# EAGLE board Current Sensor PCB Electronic Design (EAGLE 9.7.0)
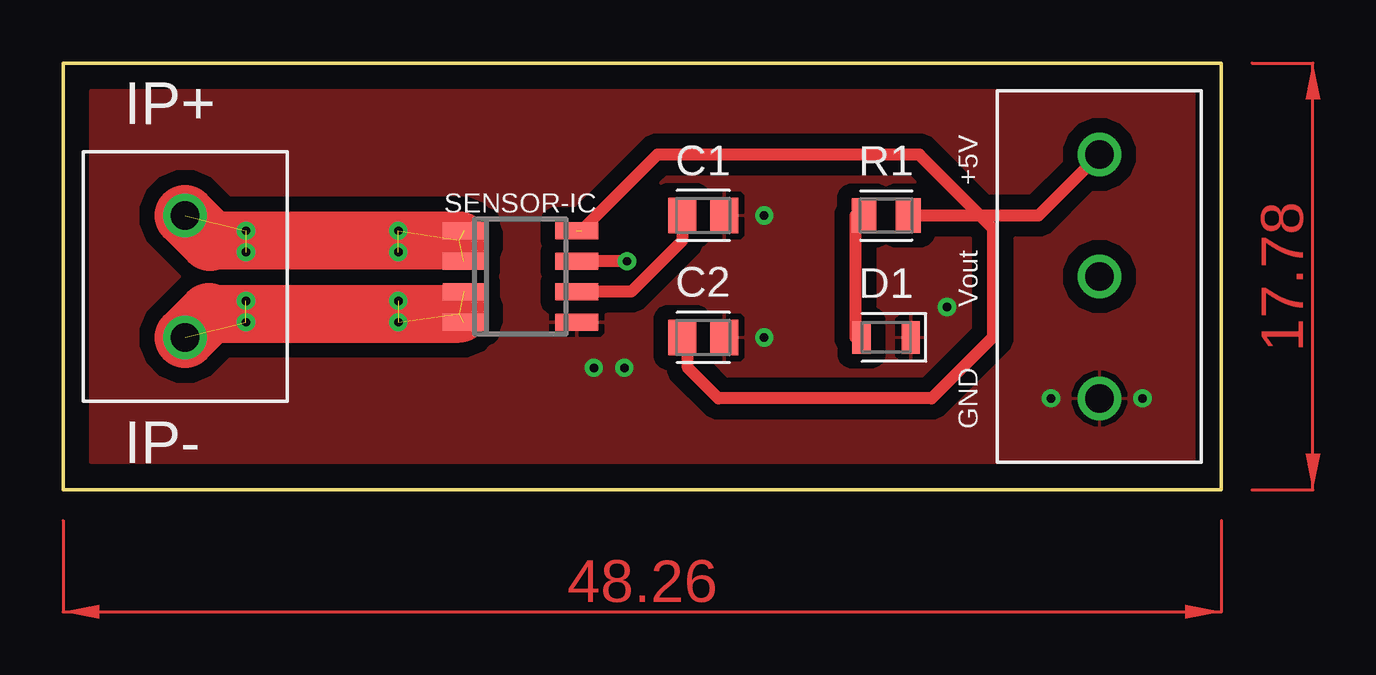
[diagram p0: board, top side]
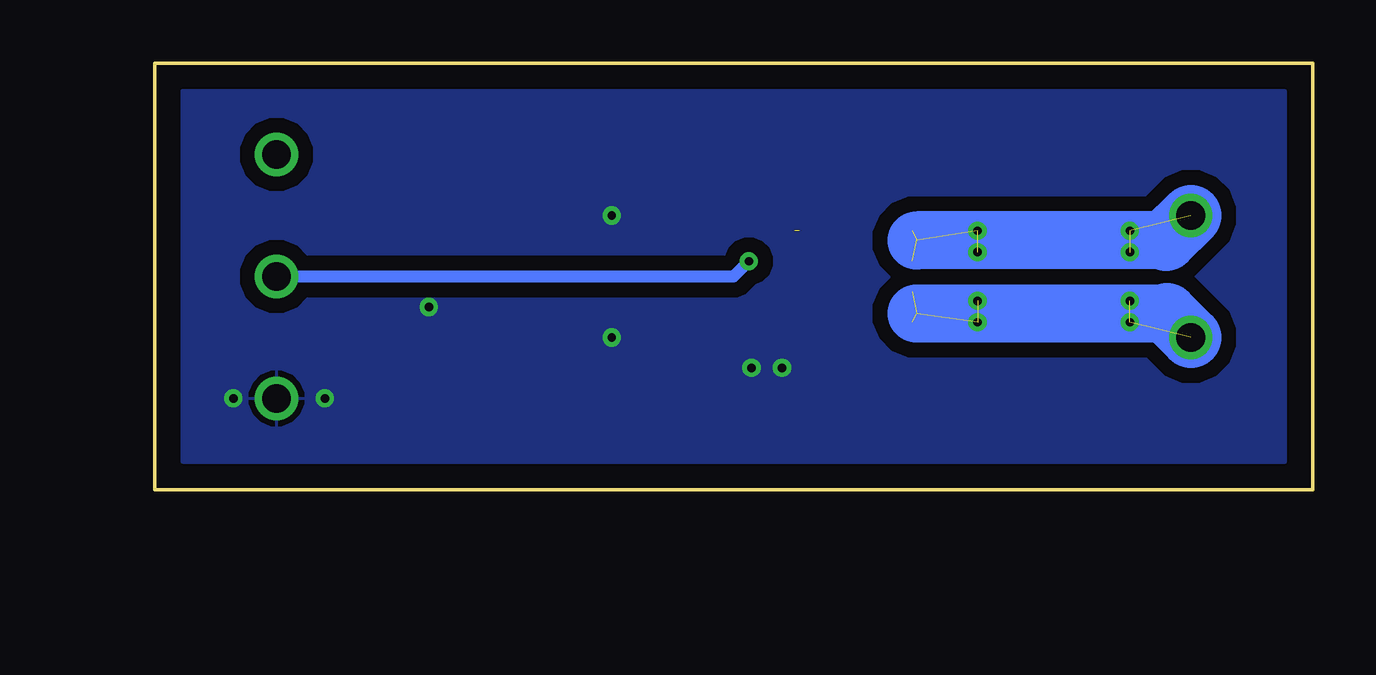
[diagram p1: board, bottom side, seen from below]

Size 48.26 x 17.78 mm. Coordinates in mm from the lower left corner, seen from the top.
Outline: 48.26,17.78 0,17.78 0,0 48.26,0 48.26,17.78
Copper layers (1*16): Top / Bottom
Stack-up Default Layer Stack: Top User Defined 0.035mm / Dielectric-1 User Defined 1.5mm / Bottom User Defined 0.035mm
Design rules: minimum drill size 0.35mm, minimum copper width 20mil, keepout clearance 0mil, drill distance 6mil, via restrict clearance 0mil, dimension clearance 40mil, restrict clearance 0mil, copper clearance wire_polygon to wire_polygon 6mil, copper clearance wire_polygon to pad_smd 6mil, copper clearance wire_polygon to via 6mil, copper clearance pad_smd to pad_smd 6mil, copper clearance pad_smd to via 6mil, copper clearance via to via 6mil, copper clearance smd to pad (same net) 6mil, copper clearance smd to via (same net) 6mil, copper clearance smd to smd (same net) 6mil

## Footprints (pad centres in the part's own frame; a part is rotated, then mirrored left to right if it is on the bottom)
CAPC2012X110 = smd 1.165 x 1.465: 1 -0.875,0; 2 0.875,0
LEDC2012X110N_FLAT-B = smd 0.762 x 1.362: A 1.025,0; C -1.025,0
TERMBLK_508-2N = drill 1.2: 1 0,0; 2 5.08,0
TERMBLK_508-3N = drill 1.2: 1 0,0; 2 5.08,0; 3 10.16,0
RESC2012X65 = smd 1.031 x 1.42: 1 -0.919,0; 2 0.919,0
SO08 = smd 0.72 x 1.78: 1 -1.905,-2.35; 2 -0.635,-2.35; 3 0.635,-2.35; 4 1.905,-2.35; 5 1.905,2.35; 6 0.635,2.35; 7 -0.635,2.35; 8 -1.905,2.35

## Placement (x,y rotation side)
C1  1nF  [CAPC2012X110]  26.67,11.43 0 top
C2  0.1uF  [CAPC2012X110]  26.67,6.35 0 top
D1  LED_BLUE  [LEDC2012X110N_FLAT-B]  34.29,6.35 180 top
J1  TERM-BLK-2P  [TERMBLK_508-2N]  5.08,6.35 90 top
J2  TERM-BLK-3P  [TERMBLK_508-3N]  43.18,13.97 270 top
R1  1K  [RESC2012X65]  34.29,11.43 180 top
SENSOR-IC  ACS712  [SO08]  19.05,8.89 270 top

## Library data of the parts
C1 C2 = Capacitor; CATEGORY: Capacitor
D1 = LED; CATEGORY: LED; COLOR: BLUE; DESCRIPTION: CHIP LED FLAT; SUB-CATEGORY: CHIP; TYPE: FLAT_TOP
J1 = Connector; CATEGORY: Fixed Terminal Blocks; DESCRIPTION: Fixed Terminal Blocks 5.08MM PCB MOUNT 2P; MANUFACTURER: TE Connectivity AMP Connectors; MPN: 282837-2; OPERATING_TEMPERATURE: -40°C to +105°C; PART_STATUS: ACTIVE; PITCH: 0.200" (5.08mm); ROHS_COMPLIANCE: RoHS Compliant; SERIES: Buchanan; SUBCATEGORY: Terminal Blocks; TYPE: Through Hole; Screw - Rising Cage Clamp; Side wire entry, Horizontal with Board
J2 = Connector; CATEGORY: Connector; DESCRIPTION: TERM BLK 3P SIDE ENT 5.08mm PCB; MANUFACTURER: TE Connectivity; MPN: 282837-3; OPERATING_TEMPERATURE: -40°C to +105°C; PART_STATUS: Active; PITCH: 0.200" (5.08mm); ROHS_COMPLIANCE: RoHS Compliant; SERIES: Buchanan; SUBCATEGORY: Terminal Block; TYPE: Side Wire Entry
R1 = Resistor; CATEGORY: Resistor; SUB-CATEGORY: Fixed
SENSOR-IC = ACS712-2nd

## Nets
+5V: C2.1 J2.1 R1.1 SENSOR-IC.8
GND: C1.2 C2.2 D1.C J2.3 SENSOR-IC.5
IP+: J1.2 SENSOR-IC.1 SENSOR-IC.2
IP-: J1.1 SENSOR-IC.3 SENSOR-IC.4
N$1: C1.1 SENSOR-IC.6
N$2: D1.A R1.2
VOUT: J2.2 SENSOR-IC.7

## Tracks (layer width: path | path; a pad name or v marks a point on that pad's centre or on a via)
+5V  (1 unrouted)
  Top 0.508: 38.21,11.43 40.64,11.43 J2.1 | C2.1 26.04,6.35 26.04,5.08 27.3,3.81 36.18,3.81 38.73,6.36 38.73,10.91 38.21,11.43 | 21.59,10.79 24.77,13.97 35.67,13.97 38.21,11.43 | 38.21,11.43 R1.1
GND  (via drill 0.35)
  other vias: 29.21,6.35 36.83,7.62 22.11,5.08 23.38,5.08 44.97,3.81 41.16,3.81 29.21,11.43
  pour Top (isolate 0.61): -1.27,19.05 49.53,19.05 49.53,-1.27 -1.27,-1.27
  pour Bottom (isolate 0.61): -1.27,19.05 49.53,19.05 49.53,-1.27 -1.27,-1.27
IP+  (via drill 0.35)  (6 unrouted)
  Top 2.413: 6.12,10.39 16.51,10.39
  Top 2.54: J1.2 6.12,10.39
  Bottom 2.413: 6.12,10.39 16.51,10.39
  Bottom 2.54: J1.2 6.12,10.39
  other vias: 7.62,9.91 7.62,10.79 13.97,9.91 13.97,10.79
IP-  (via drill 0.35)  (6 unrouted)
  Top 2.413: 6.07,7.35 16.51,7.35
  Top 2.54: J1.1 6.07,7.35
  Bottom 2.413: 6.07,7.35 16.51,7.35
  Bottom 2.54: J1.1 6.07,7.35
  other vias: 7.62,7.87 7.62,6.99 13.97,7.87 13.97,6.99
N$1
  Top 0.508: C1.1 25.79,10.39 23.66,8.26 SENSOR-IC.6
N$2
  Top 0.508: D1.A 33.02,6.35 33.02,11.43 R1.2
VOUT  (via drill 0.35)
  Top 0.508: v23.49,9.53 SENSOR-IC.7
  Bottom 0.508: v23.49,9.53 24.13,8.89 J2.2
(copper drawn outside any net)
  shapes: Top area x2

## Text on the board
SilkscreenTop: IP+ | +5V | Vout | GND | IP-